# Altium PCB PCB1_Young.PcbDoc
Units mm, origin at the board's own origin, x right, y up, seen from the top; angles counter-clockwise.
Board outline 87.73 x 50.63 mm, 2 copper layers (Top Layer, Bottom Layer); 30 components, 28 nets, 130 pads, 0 vias.
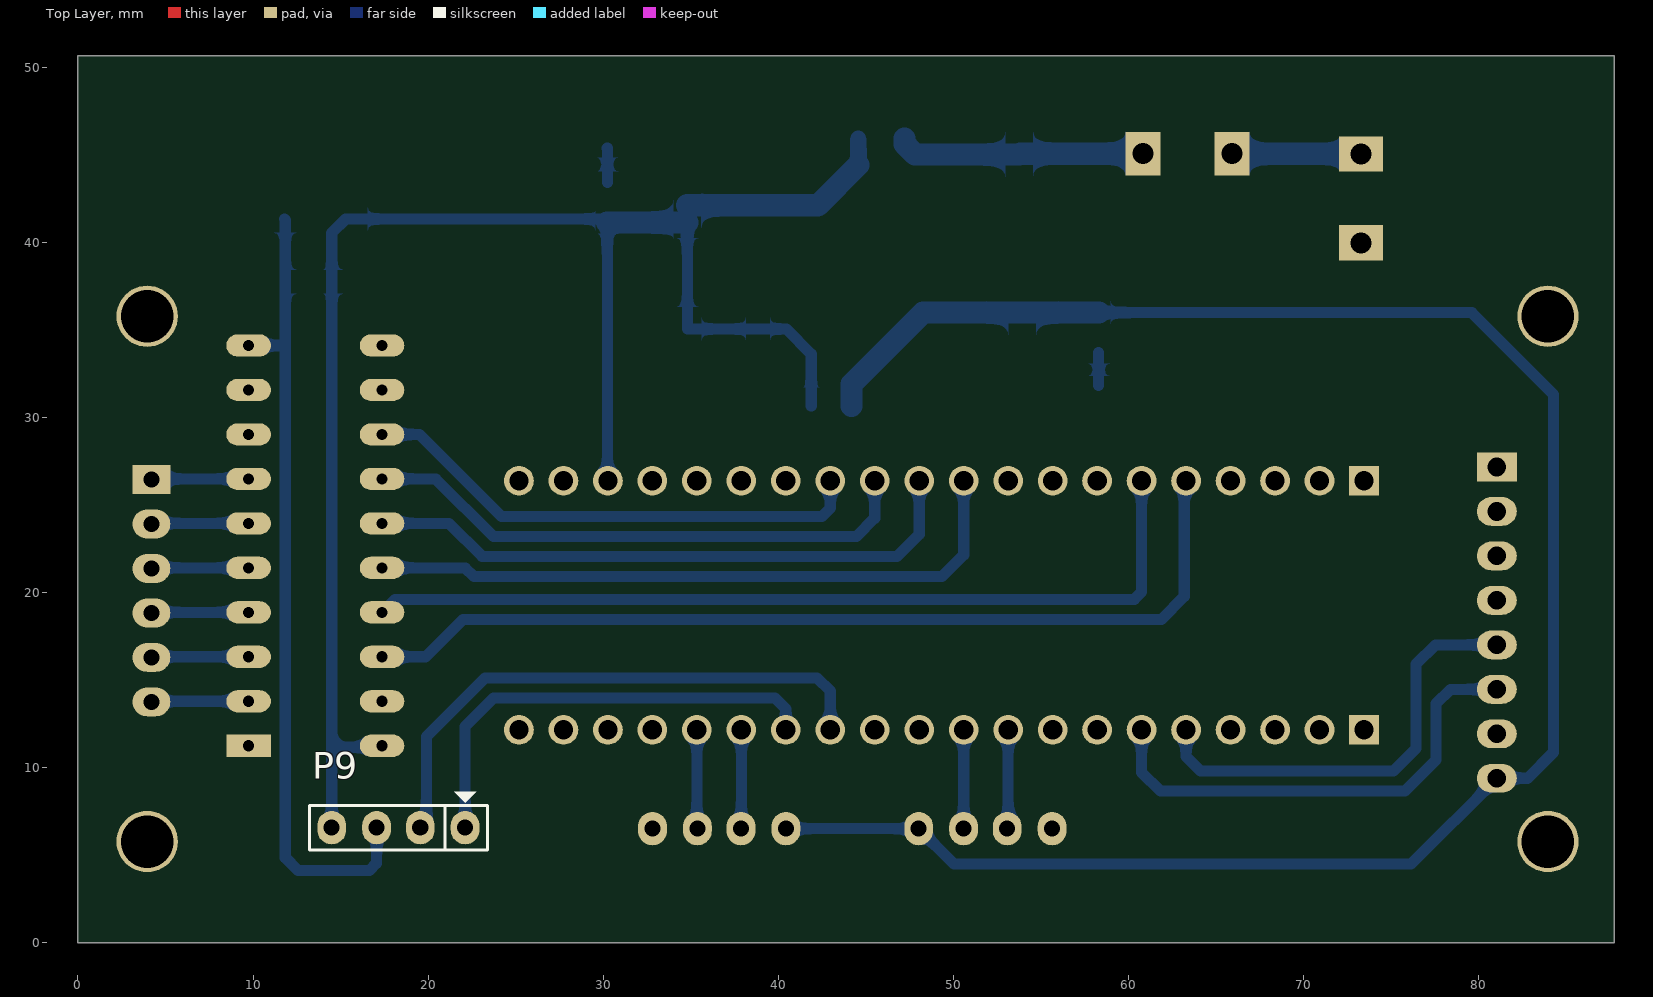
[diagram p0: Top Layer view]
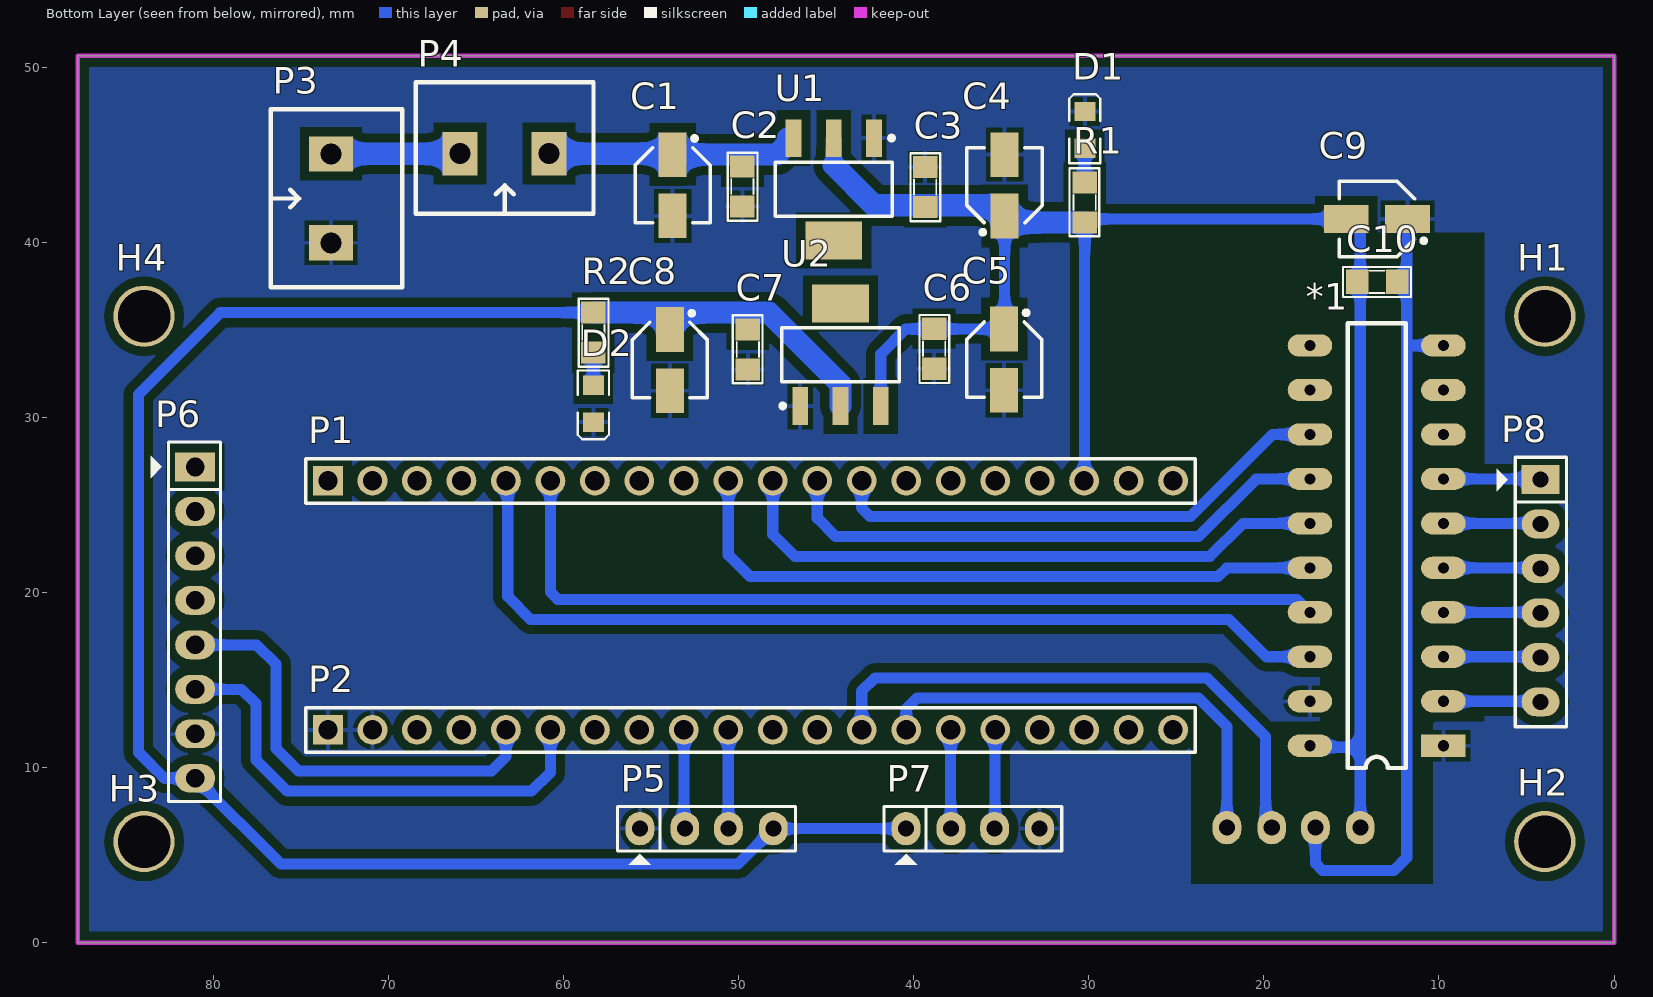
[diagram p1: Bottom Layer view, seen from below]
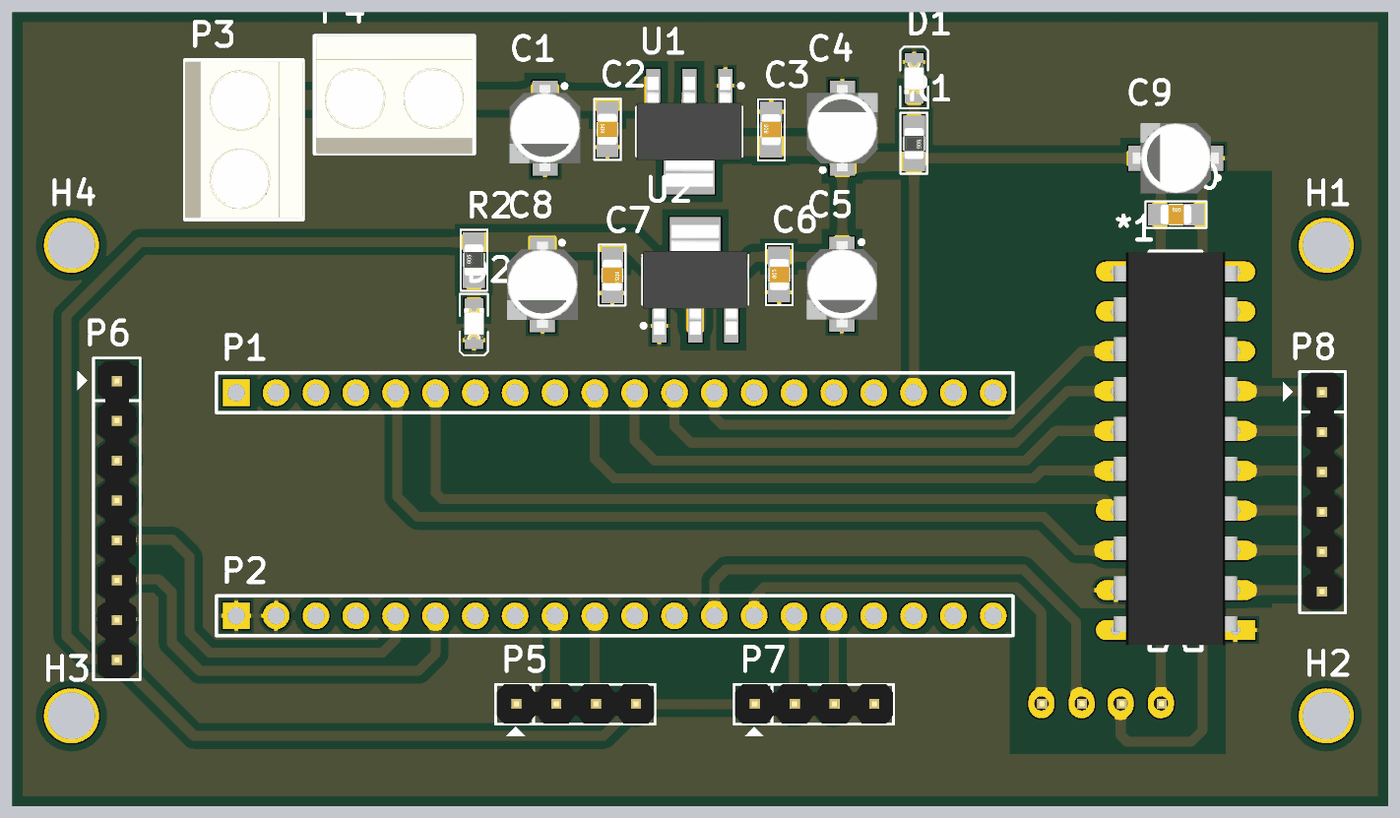
[diagram p2: 3D render of the assembled board from below, using the file's embedded part models]

## Layer stack, top to bottom
Top Solder: solder mask 0.0102, Solder Resist, Dk 3.5
Top Layer: signal copper 0.0356
Dielectric 1: dielectric 0.32, FR-4, Dk 4.8
Bottom Layer: signal copper 0.0356
Bottom Solder: solder mask 0.0102, Solder Resist, Dk 3.5

## Board outline
0,0 87.728,0 87.728,50.634 0,50.634

## Design rules (kind name [scope] priority, off if disabled: settings)
Clearance [All] p1: gap=0.508 ignorepadtopadclearanceinfootprint=FALSE except(0: Arc-Hole Track-Hole SMDPad-Hole THPad-Hole Via-Hole Fill-Hole Poly-Hole Region-Hole Text-Hole)
MinimumSolderMaskSliver [All] p1: minsoldermaskwidth=0
PolygonConnect [All] p1: connectstyle=Relief reliefconductorwidth=0.254 reliefentries=4 polygonreliefangle="90 Angle" airgapwidth=0.254
RoutingVias [All] p1: holewidth=0.5 width=1 viastyle="Through Hole" minholewidth=0.5 minwidth=1 maxholewidth=1 maxwidth=2
SilkToSilkClearance [All] p1: silktosilkclearance=0
SilkToSolderMaskClearance [IsPad] p1: minsilkscreentomaskgap=0 clearancetoexposedcopper=TRUE
SolderMaskExpansion [All] p1: expansion=0.102
Width [All] p1: maxlimit=1.27 minlimit=0.254 preferedwidth=0.635
27 further rules are at their usual default settings.

## Components (designator, comment, footprint, x,y, rotation, side; value= is the part's Value field where it differs from the comment)
*1 "74HC245" DIP20-3D 9.747,11.238 r0 bottom
C1 "Cap Pol SMD" "CAP ALU SIZE B" 53.763,43.247 r270 bottom value=220uF
C2 "Cap Non-Pol SMD" CAP-SM-0805 49.781,42.033 r90 bottom value=100nF
C3 "Cap Non-Pol SMD" CAP-SM-0805 39.343,42.003 r90 bottom value=100nF
C4 "Cap Pol SMD" "CAP ALU SIZE B" 34.804,43.245 r90 bottom value=220uF
C5 "Cap Pol SMD" "CAP ALU SIZE B" 34.828,33.292 r270 bottom value=220uF
C6 "Cap Non-Pol SMD" CAP-SM-0805 38.835,32.767 r90 bottom value=100nF
C7 "Cap Non-Pol SMD" CAP-SM-0805 49.473,35.009 r270 bottom value=100nF
C8 "Cap Pol SMD" "CAP ALU SIZE B" 53.927,33.264 r270 bottom value=220uF
C9 "Cap Pol SMD" "CAP ALU SIZE B" 13.545,41.322 r0 bottom value=220uF
C10 "Cap Non-Pol SMD" CAP-SM-0805 14.671,37.736 r180 bottom value=100nF
D1 "LED SMD" LED_0805_Blue 30.227,46.415 r90 bottom
D2 "LED SMD" LED_0805_Blue 58.294,30.771 r270 bottom
H1 "Hole" "LO KHOAN 3MM" 3.953,35.769 r180 bottom
H2 "Hole" "LO KHOAN 3MM" 3.953,5.769 r180 bottom
H3 "Hole" "LO KHOAN 3MM" 83.953,5.769 r180 bottom
H4 "Hole" "LO KHOAN 3MM" 83.953,35.769 r180 bottom
P1 "Header 21-40" HDR1X20 73.445,26.37 r180 bottom
P2 "Header 1-20" HDR1X20 73.445,12.146 r180 bottom
P3 "Domino 2" "DOMINO 2- 5mm" 73.283,42.504 r90 bottom
P4 "Domino 2" "DOMINO 2- 5mm" 63.365,45.053 r0 bottom
P5 "Header 4" JP4 53.096,6.504 r180 bottom
P6 "Header 8" JP8 81.03,27.161 r270 bottom
P7 "Header 4" JP4 37.892,6.504 r180 bottom
P8 "Header 6" JP6 4.199,26.444 r270 bottom
P9 "Header 4" JP4 19.575,6.56 r180 top
R1 "RESISTOR SMD" RES-SM-0805 30.234,43.407 r270 bottom value=220
R2 "RESISTOR SMD" RES-SM-0805 58.294,33.692 r90 bottom value=220
U1 "AMS1117-5" SOT230P700X180-4N 44.564,43.017 r270 bottom
U2 "AMS1117-3.3" SOT230P700X180-4N 44.178,33.57 r90 bottom

## Footprints (in the part's own frame and the unit in brackets; to place one, negate y for a bottom-side part, rotate by r counter-clockwise, add the part's x,y. Pads: shape width x height; smd on the part's side, far side on the other; paste and mask are expansions set on the pad)
"CAP ALU SIZE B" [mm] "Capacitor, Aluminium Electrolytric, 4.3mm L X 4.3mm W X 5.4mm H, IPC Medium Density"
  rect 2.55x1.6 smd: 1(-1.75,0) 2(1.75,0)
  silkscreen extent -2.8,-2.15 2.15,2.15, body extent -2.75,-2.25 2.75,2.25, height 5.7
CAP-SM-0805 [mil]
  rect 50x55 smd: 1(0,0) 2(90,0)
  silkscreen extent -32,-34 121,33, body extent 6,-25 84,25, height 31
DIP20-3D [mm]
  rect 2.54x1.27 hole 0.635: 1(0,0)
  oval 2.54x1.27 hole 0.635: 2(0,-2.54) 3(0,-5.08) 4(0,-7.62) 5(0,-10.16) 6(0,-12.7) 7(0,-15.24) 8(0,-17.78) 9(0,-20.32) 10(0,-22.86) 11(7.62,-22.86) 12(7.62,-20.32) 13(7.62,-17.78) 14(7.62,-15.24) 15(7.62,-12.7) 16(7.62,-10.16) 17(7.62,-7.62) 18(7.62,-5.08) 19(7.62,-2.54) 20(7.62,0)
  silkscreen extent 2.16,-24.13 5.46,1.27, body extent -0.15,-24.08 7.77,0.96, height 4.55
"DOMINO 2- 5mm" [mm]
  rect 2x2.5 hole 1.2: 1(-2.54,0) 2(2.54,0)
  silkscreen extent -5.08,-4.08 5.08,3.43, body extent -5,-4.07 5,3.43, height 10
HDR1X20 [mm] "Connector; Header; 20 Position"
  rect 1.7x1.7 hole 1.1: 1(0,0)
  round 1.7 hole 1.1: 2(2.54,0) 3(5.08,0) 4(7.62,0) 5(10.16,0) 6(12.7,0) 7(15.24,0) 8(17.78,0) 9(20.32,0) 10(22.86,0) 11(25.4,0) 12(27.94,0) 13(30.48,0) 14(33.02,0) 15(35.56,0) 16(38.1,0) 17(40.64,0) 18(43.18,0) 19(45.72,0) 20(48.26,0)
  silkscreen extent -1.27,-1.27 49.53,1.27
JP4 [mil] "Jumper 4"
  oval 65x75 hole 36: 1(-100,0) 2(1,0) 3(99,0) 4(200,0)
  silkscreen extent -150,-81 250,50, body extent -148,-48 248,50, height 323
JP6 [mil] "JP6"
  rect 65x85 hole 36: 1(0,0)
  oval 65x85 hole 36: 2(100,0) 3(200,0) 4(300,0) 5(400,0) 6(500,0)
  silkscreen extent -50,-99 556,58, body extent -48,-50 548,48, height 323
JP8 [mil] "JP8"
  rect 65x90 hole 42: 1(0,0)
  oval 65x90 hole 42: 2(100,0) 3(200,0) 4(300,0) 5(400,0) 6(500,0) 7(600,0) 8(700,0)
  silkscreen extent -56,-100 752,57, body extent -48,-50 748,48, height 323
LED_0805_Blue [mm] "Chip LED, 2-Leads, Body 2.0x1.3mm, IPC Medium Density"
  rect 1.1x1.2 smd: 1(-1.05,0) 2(1.05,0)
  silkscreen extent -1.91,-0.89 2.03,0.89, body extent -1,-0.63 1,0.62, height 0.68
"LO KHOAN 3MM" [mil]
  round 138 hole 118.1: 1(0,0)
RES-SM-0805 [mil]
  rect 50x55 smd: 1(0,0) 2(90,0)
  silkscreen extent -32,-34 121,33, body extent 6,-25 84,25, height 31
SOT230P700X180-4N [mm] "SOT223, 4-Leads, Body 6.50x7.00mm (avg), Pitch 2.30mm, IPC Medium Density"
  rect 2.15x0.9 smd: 1(-2.925,2.3) 2(-2.925,0) 3(-2.925,-2.3)
  rect 2.15x3.25 smd: 4(2.925,0)
  silkscreen extent -3.05,-3.35 1.55,3.42, body extent -3.5,-3.35 3.5,3.35, height 1.8

## Part data
C1 C4 C5 C8 C9: "Polarized Capacitor (Radial)"
C2 C3 C6 C7 C10: "Capacitor"
D1 D2: "LED"
H1 H2 H3 H4: "Hole 3mm"
P1 P2: library part "Header 20", "Header, 20-Pin", LatestRevisionDate=17-Jul-2002, LatestRevisionNote="Re-released for DXP Platform.", Publisher="Altium Limited"
P3 P4: "Domino, 2-Pin", LatestRevisionDate=17-Jul-2002, LatestRevisionNote="Re-released for DXP Platform.", Publisher="Altium Limited"
P5 P7 P9: "Header, 4-Pin", LatestRevisionDate=17-Jul-2002, LatestRevisionNote="Re-released for DXP Platform.", Publisher="Altium Limited"
P6: "Header, 8-Pin", LatestRevisionDate=17-Jul-2002, LatestRevisionNote="Re-released for DXP Platform.", Publisher="Altium Limited"
P8: "Header, 6-Pin", LatestRevisionDate=17-Jul-2002, LatestRevisionNote="Re-released for DXP Platform.", Publisher="Altium Limited"
R1 R2: "Resistor"
U1: library part AMS1117-3.3, Package=None, Availability=Unavailable, MF=NEC, MP=AMS1117-3.3, Price=None, SnapEDA_Link=https://www.snapeda.com/parts/AMS1117-3.3/NEC/view-part/?ref=snap
U2: Package=None, Availability=Unavailable, MF=NEC, MP=AMS1117-3.3, Price=None, SnapEDA_Link=https://www.snapeda.com/parts/AMS1117-3.3/NEC/view-part/?ref=snap

## Nets (pads, with @x,y where several pads share a name; then routed paths per layer and width w, separated by ;. In a path a pad name is that pad's centre, name@x,y a point inside that pad or via, vN(x,y) a via of type N, cw(c..) or ccw(c..) an arc to the next point about the centre after c; other vN are vias at no path point)
1_IN1: *1.16 P1.10 | length 38.2
  Bottom Layer w0.635: *1.16 22.119,21.398 22.619,20.898 49.345,20.898 50.585,22.139 P1.10
1_IN2: *1.15 P1.11 | length 35
  Bottom Layer w0.635: *1.15 21.195,23.938 23.092,22.041 46.77,22.041 48.045,23.316 P1.11
1_IN3: *1.14 P1.12 | length 32.1
  Bottom Layer w0.635: *1.14 20.433,26.478 23.728,23.184 44.455,23.184 45.505,24.234 P1.12
1_IN4: *1.13 P1.13 | length 29.3
  Bottom Layer w0.635: *1.13 19.51,29.018 24.201,24.327 42.485,24.327 42.965,24.807 P1.13
3.3: C7.1 C8.1 P5.4 P6.8 P7.1 R2.2 U2.2 | length 112.7
  Bottom Layer w0.635: P7.1 P5.4 50.028,4.492 76.14,4.492 P6.8 82.793,9.381 84.278,10.867 84.278,31.298 79.599,35.978 R2.2
  Bottom Layer w1.27: U2.2 44.178,31.882 48.274,35.978 R2.2
5V: *1.20 C3.1 C4.1 C5.1 C6.2 C9.2 C10.1 P1.18 P9.4 R1.2 U1.2 U2.3 | length 102
  Bottom Layer w0.635: P9.4 14.495,11.152 ; *1.20 17.367,11.152 14.495,11.152 ; P1.18 30.234,26.402 R1.2 30.033,41.322 C9.2 14.495,40.522 14.495,37.736 14.495,11.152 ; C4.1@34.804,41.121 34.804,35.066 C5.1 40.456,35.042 41.878,33.619 U2.3 ; C4.1 C4.1@34.804,42.1
  Bottom Layer w0.889: 44.564,44.409 U1.2
  Bottom Layer w1.27: R1.2 C4.1@34.804,41.121 ; C4.1@34.804,42.1 42.256,42.1 44.564,44.409
CA1: P2.9 P5.2 | length 5.7
  Bottom Layer w0.635: P5.2 53.125,6.558 P2.9
CA2: P2.15 P7.2 | length 5.7
  Bottom Layer w0.635: P7.2 37.885,6.523 P2.15
CB1: P2.10 P5.3 | length 5.6
  Bottom Layer w0.635: P5.3 50.585,6.507 P2.10
CB2: P2.16 P7.3 | length 5.7
  Bottom Layer w0.635: P2.16 35.345,6.535 P7.3
GND: *1.1 *1.10 *1.19 C1.2 C2.1 C3.2 C4.2 C5.2 C6.1 C7.2 C8.2 C9.1 C10.2 D1.2 D2.2 P2.1 P2.2 P3.1 P5.1 P6.7 P7.4 P9.3 U1.1 U2.1 | length 46.3
  Bottom Layer w0.635: *1.10 11.836,34.098 11.843,34.105 ; C9.1 11.843,41.274 11.843,34.105 ; P9.3 17.06,4.531 16.646,4.117 12.568,4.117 11.843,4.843 11.843,34.105
Net*1_2: *1.2 P8.6 | length 5.6
  Bottom Layer w0.635: P8.6 4.233,13.778 *1.2
Net*1_3: *1.3 P8.5 | length 5.6
  Bottom Layer w0.635: P8.5 4.233,16.318 *1.3
Net*1_4: *1.4 P8.4 | length 5.6
  Bottom Layer w0.635: P8.4 4.233,18.858 *1.4
Net*1_5: *1.5 P8.3 | length 5.6
  Bottom Layer w0.635: P8.3 4.233,21.398 *1.5
Net*1_6: *1.6 P8.2 | length 5.6
  Bottom Layer w0.635: P8.2 4.233,23.938 *1.6
Net*1_7: *1.7 P8.1 | length 5.6
  Bottom Layer w0.635: P8.1 4.233,26.478 *1.7
NetC1_1: C1.1 C2.2 P4.1 U1.3 | length 14.2
  Bottom Layer w1.27: U1.3@47.205,45.926 47.205,45.602 47.809,44.997 C1.1 53.819,45.053 P4.1
NetD1_1: D1.1 R1.1 | length 2
  Bottom Layer w0.635: D1.1 30.234,45.358 R1.1
NetD2_1: D2.1 R2.1 | length 1.9
  Bottom Layer w0.635: D2.1 R2.1
NetP3_2: P3.2 P4.2 | length 7.4
  Bottom Layer w1.27: P4.2 65.914,45.044 P3.2
PWM1: *1.18 P1.5 | length 53.9
  Bottom Layer w0.635: *1.18 19.853,16.318 21.993,18.458 61.885,18.458 63.179,19.752 63.179,26.264 P1.5
PWM2: *1.17 P1.6 | length 50.2
  Bottom Layer w0.635: *1.17 18.11,19.601 60.325,19.601 60.745,20.022 P1.6
RX: P2.14 P9.1 | length 26.2
  Bottom Layer w0.635: P9.1 22.115,12.348 23.734,13.967 39.799,13.967 40.425,13.341 P2.14
SCL: P2.6 P6.6 | length 27.4
  Bottom Layer w0.635: P2.6 60.745,9.719 61.821,8.644 75.776,8.644 77.563,10.431 77.563,13.64 78.384,14.461 P6.6
SDA: P2.5 P6.5 | length 25.4
  Bottom Layer w0.635: P2.5 63.285,10.617 64.116,9.787 75.133,9.787 76.42,11.073 76.42,15.897 77.525,17.001 P6.5
TX: P2.13 P9.2 | length 32.3
  Bottom Layer w0.635: P9.2 19.907,6.918 19.907,11.759 23.259,15.11 42.21,15.11 42.965,14.355 P2.13
VB: P2.20
pads on no net: *1.8 *1.9 *1.11 *1.12 H1.1 H2.1 H3.1 H4.1 P1.1 P1.2 P1.3 P1.4 P1.7 P1.8 P1.9 P1.14 P1.15 P1.16 P1.17 P1.19 P1.20 P2.3 P2.4 P2.7 P2.8 P2.11 P2.12 P2.17 P2.18 P2.19 P6.1 P6.2 P6.3 P6.4 U1.4 U2.4

## Polygon pours and split planes (outlines as drawn)
GND on Bottom Layer "GND_L02_P014" (solid, remove dead copper, pour order 14): 0,0 87.728,0 87.728,50.634 0,50.634

## Keep-outs
Bottom Layer:
  the board outline again, w0.254

## Other copper
Bottom Layer:
  pour cut-out: -0.316,202.96
  pour cut-out: -0.316,143.025
  pour cut-out: -0.316,82.537
  pour cut-out: -0.254,148.191
  pour cut-out: -0.254,209.036
  pour cut-out: 10.323,12.663 10.363,12.623 10.363,3.345 24.152,3.345 24.152,12.603
  pour cut-out: -0.127,22.051
  pour cut-out: 16.767,40.525 16.767,12.645 7.414,12.645 7.414,40.525